# Altium PCB CN02.PcbDoc
Units mm, origin at the board's own origin, x right, y up, seen from the top; angles counter-clockwise.
Board outline 43 x 71 mm, 2 copper layers (Top Layer, Bottom Layer); 78 components, 54 nets, 313 pads, 183 vias.
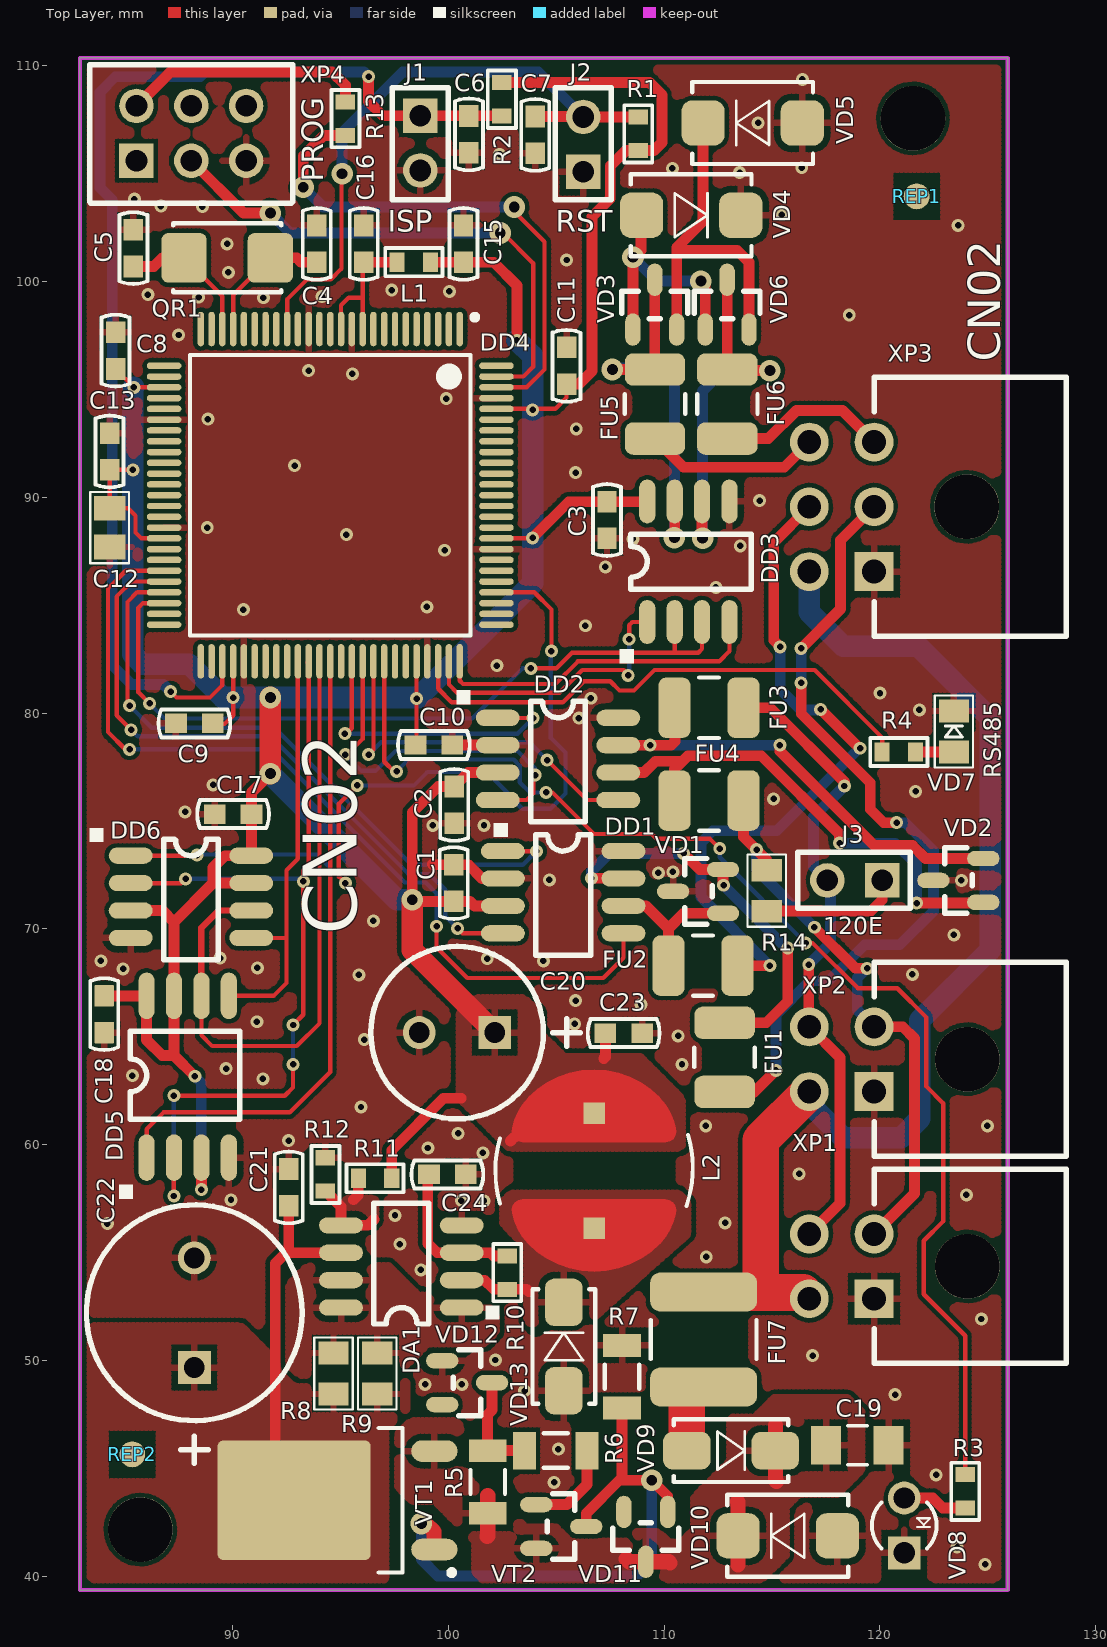
[diagram p0: Top Layer view]
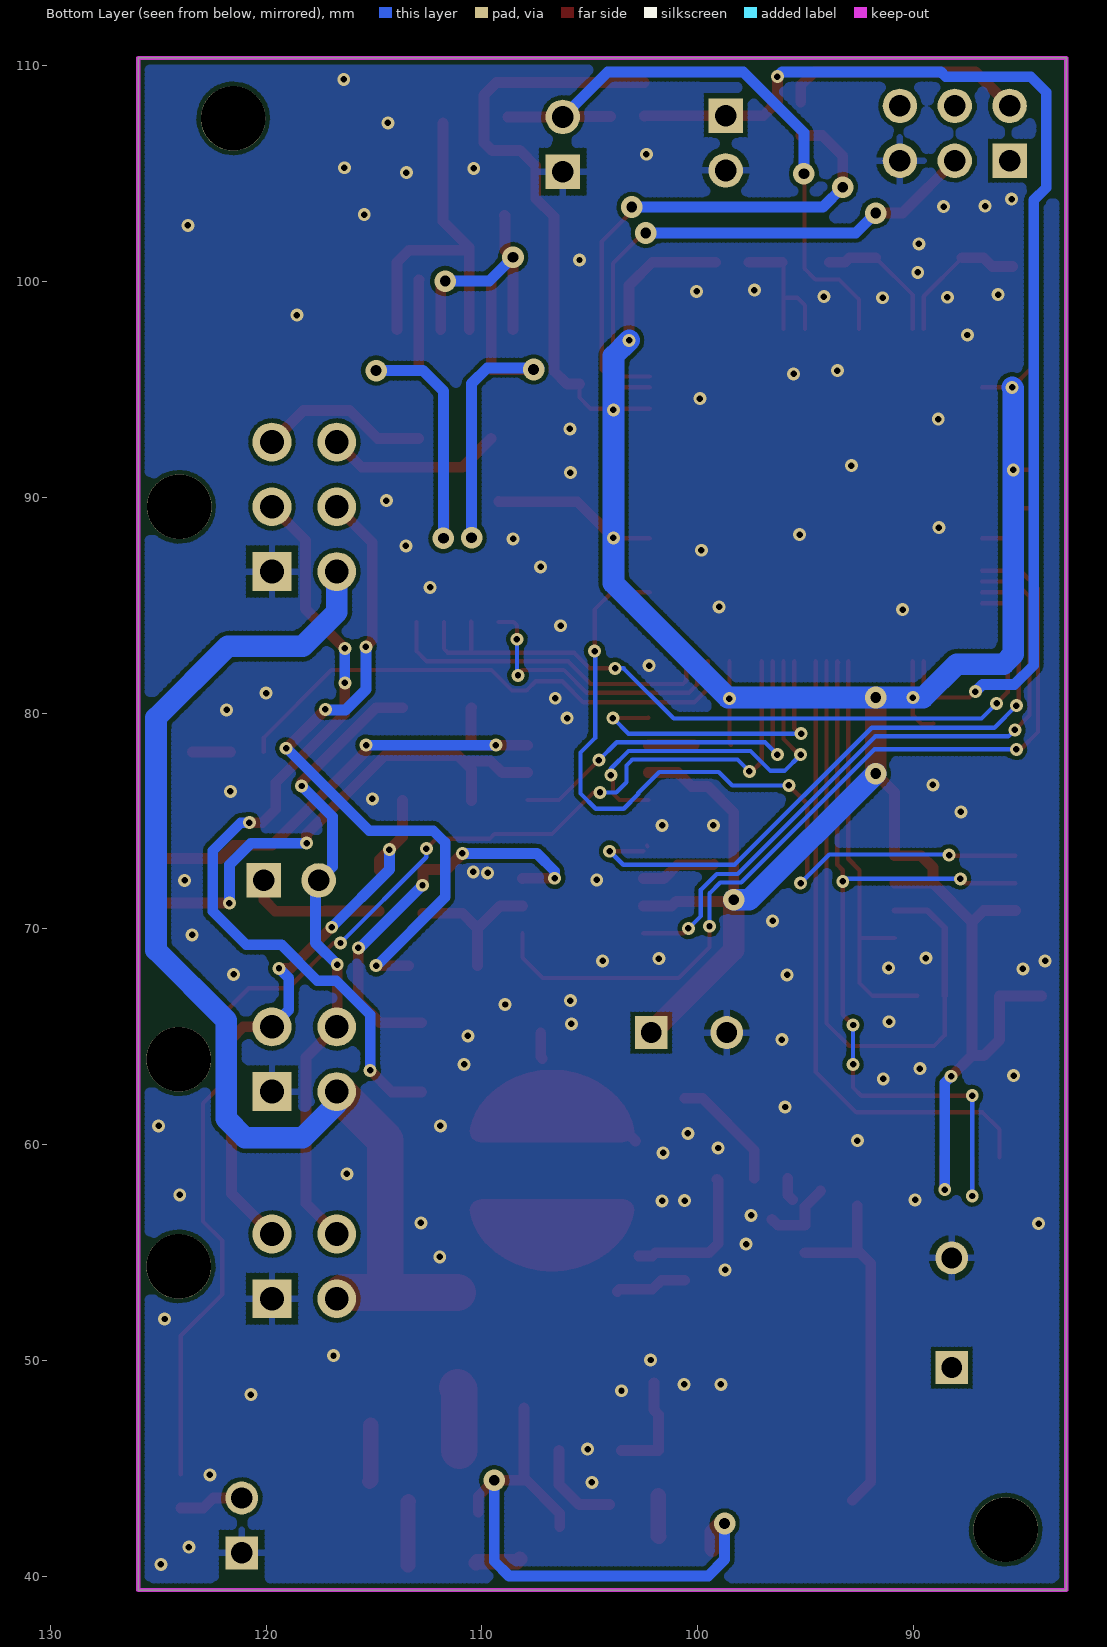
[diagram p1: Bottom Layer view, seen from below]

## Layer stack, top to bottom
Top Solder: solder mask 0.0102, Solder Resist, Dk 3.5
Top Layer: signal copper 0.0356
Dielectric 1: dielectric 0.32, FR-4, Dk 4.8
Bottom Layer: signal copper 0.0356
Bottom Solder: solder mask 0.0102, Solder Resist, Dk 3.5

## Board outline
82.925,39.364 125.925,39.364 125.925,110.364 82.925,110.364

## Design rules (kind name [scope] priority, off if disabled: settings)
Clearance [All] p1: gap=0.2 ignorepadtopadclearanceinfootprint=FALSE
HoleSize [All] p1: absolutevalues=TRUE maxlimit=10 minlimit=0.025 maxpercent=80.000 minpercent=20.000
MinimumSolderMaskSliver [All] p1: minsoldermaskwidth=0.05
PolygonConnect PolygonConnect_1 [IsVia OR InComponent('VT1') AND InNet('VIN_F')] p1: connectstyle=Direct reliefconductorwidth=0.254 reliefentries=4 polygonreliefangle="90 Angle" airgapwidth=0.254
PolygonConnect [All] p2: connectstyle=Relief reliefconductorwidth=0.3 reliefentries=4 polygonreliefangle="90 Angle" airgapwidth=0.3
RoutingVias [All] p1: holewidth=0.4 width=0.8 viastyle="Through Hole" minholewidth=0.3 minwidth=0.6 maxholewidth=0.5 maxwidth=1
SilkToSilkClearance [All] p1: silktosilkclearance=0.1
SilkToSolderMaskClearance [IsPad] p1: minsilkscreentomaskgap=0.15 clearancetoexposedcopper=TRUE
SolderMaskExpansion [All] p1: expansion=0.102
Width [All] p1: maxlimit=3 minlimit=0.2 preferedwidth=0.5
26 further rules are at their usual default settings.

## Classes and differential pairs
component class Power: C19 C20 C21 C22 C23 C24 DA1 FU7 L2 R5 R6 R7 R8 R9 R10 R11 R12 VD9 VD10 VD11 VD12 VD13 VT1 VT2
component class MCU: C4 C5 C6 C7 C8 C9 C10 C11 C12 C13 C15 C16 C17 C18 DD4 DD5 DD6 J1 J2 L1 QR1 R1 R2 R3 R4 REP1 REP2 VD7 VD8
component class Interface: C1 C2 C3 DD1 DD2 DD3 FU1 FU2 FU3 FU4 FU5 FU6 J3 R14 VD1 VD2 VD3 VD4 VD5 VD6
component class Connections: R13 XP1 XP2 XP3 XP4

## Components (designator, comment, footprint, x,y, rotation, side; value= is the part's Value field where it differs from the comment)
C1 "0.1uF" CC0603 100.25,72.125 r270 top
C2 "0.1uF" CC0603 100.275,75.75 r90 top
C3 "0.1uF" CC0603 107.35,88.95 r270 top
C4 "22pF" CC0603 93.9,101.75 r270 top
C5 "22pF" CC0603 85.4,101.55 r270 top
C6 "200pF" CC0603 100.95,106.825 r90 top
C7 "200pF" CC0603 104.025,106.8 r90 top
C8 "0.1uF" CC0603 84.575,96.8 r270 top
C9 "0.1uF" CC0603 88.225,79.525 r0 top
C10 "0.1uF" CC0603 99.325,78.525 r180 top
C11 "0.1uF" CC0603 105.475,96.1 r270 top
C12 "10uF" CC0805 84.3,88.6 r270 top
C13 "0.1uF" CC0603 84.3,92.125 r90 top
C15 "0.1uF" CC0603 100.7,101.75 r270 top
C16 "0.1uF" CC0603 96.075,101.75 r270 top
C17 "0.1uF" CC0603 90.025,75.325 r180 top
C18 "0.1uF" CC0603-3M 84.05,66.05 r270 top
C19 "0.1uF" CC1206 118.95,46.075 r180 top
C20 "1000uFx6.3V" CC8X3.5 102.15,65.2 r180 top
C21 "0.1uF" CC0603 92.6,58.025 r270 top
C22 "470uFx35V" CC16X10_CAP0.5(1)(Primary) 88.225,49.675 r90 top
C23 "0.1uF" CC0603 108.125,65.175 r180 top
C24 "300pF" CC0603 99.95,58.625 r180 top
DA1 "MC34063" SO-8 100.613,52.455 r90 top
DD1 "SN65HVD234D" SO-8 102.525,73.61 r270 top
DD2 "SN65HVD234D" SO-8 102.287,79.785 r270 top
DD3 "SP485EEN" SO-8 109.215,84.225 r0 top
DD4 "LPC1768FBD100" TQFP-100 100.525,97.8 r270 top
DD5 "M25PE16" EIAJ_SO8 86.015,59.407 r90 top
DD6 "FM25CL64-G" SO-8 85.275,73.395 r270 top
FU1 "MICROSMD010F" RC1210 112.8,64.05 r270 top
FU2 "MICROSMD010F" RC1210 111.8,68.3 r0 top
FU3 "MICROSMD010F" RC1210 112.075,80.25 r0 top
FU4 "MICROSMD010F" RC1210 112.075,75.95 r0 top
FU5 "MICROSMD010F" RC1210 109.575,94.325 r270 top
FU6 "MICROSMD010F" RC1210 112.925,94.325 r270 top
FU7 "MF-SMDF050" MF-SMDF 111.825,50.975 r270 top
J1 "PLS-02" PLS-02 98.7,107.689 r270 top
J2 "PLS-02" PLS-02 106.25,105.089 r90 top
J3 "PLS-02" PLS-02 120.1,72.25 r180 top
L1 "10uH" L0603 99.174,100.9 r180 top
L2 "220uH" SDR0805 106.75,58.8 r270 top
QR1 "NX5032GA-12.000MHz LN-CD-1" AC5032_2 89.75,101.1 r180 top
R1 "10k" RC0603 108.8,106.85 r270 top
R2 "10k" RC0603 102.475,108.45 r270 top
R3 "390E" RC0603 123.952,43.942 r270 top
R4 "330E" RC0603 120.875,78.2 r0 top
R5 "220k" RC1206 101.825,44.375 r270 top
R6 "220k" RC1206 104.975,45.825 r0 top
R7 "220k" RC1206 108.05,49.25 r90 top
R8 "1E" RC0805 94.675,49.4 r270 top
R9 "1E" RC0805 96.7,49.4 r270 top
R10 "560k" RC0603 102.725,54.075 r90 top
R11 "18k 1%" RC0603 96.6,58.45 r180 top
R12 "11k 1%" RC0603 94.3,58.625 r270 top
R13 "100E" RC0603 95.225,107.55 r90 top
R14 "120E" RC0805 114.75,71.775 r270 top
REP1 "REPER_POINT_1.2" REPER1.2 121.7,103.95 r90 top
REP2 "REPER_POINT_1.2" REPER1.2 85.35,45.65 r90 top
VD1 "PESD2CAN" SOT-23(123) 112.738,70.725 r0 top
VD2 "PESD2CAN" SOT-23(123) 124.799,71.234 r0 top
VD3 "BAV99" SOT-23(GSD) 108.55,97.762 r0 top
VD4 "SMBJ5.0A" SMB 111.25,103.075 r180 top
VD5 "SMBJ5.0A" SMB 114.1,107.35 r0 top
VD6 "BAV99" SOT-23(GSD) 111.9,97.762 r0 top
VD7 "BL-HGE35A-AV-TRB" LED0805 123.425,78.2 r90 top
VD8 "BL-B45V1-L" LED3 121.125,41.089 r90 top
VD9 "GS1M" SMA 113.1,45.825 r0 top value={Value}
VD10 "SMBJ150A" SMB 115.725,41.875 r0 top
VD11 "BZX84C15" SOT-23(123) 110.166,42.999 r90 top value={Value}
VD12 "BZX84C39" SOT-23(123) 99.701,49.991 r180 top value={Value}
VD13 "SS14" SMA 105.35,50.65 r90 top
VT1 "FQD5P20TM" D-PAK(TO-252AA) 94.85,43.525 r180 top
VT2 "BC807-40" SOT-23(123) 104.062,43.325 r180 top
XP1 "MIF2X02PRP" MIF2X02PRP 119.725,52.864 r0 top
XP2 "MIF2X02PRP" MIF2X02PRP 119.725,62.464 r0 top
XP3 "MIF2X03PRP" MIF2X03PRP 119.725,86.564 r0 top
XP4 "PLD-06" PIN6 85.545,105.599 r0 top

## Footprints (in the part's own frame and the unit in brackets; to place one, negate y for a bottom-side part, rotate by r counter-clockwise, add the part's x,y. Pads: shape width x height; smd on the part's side, far side on the other; paste and mask are expansions set on the pad)
AC5032_2 [mm]
  rrect30% 2.1x2.3 smd mask+0.076: 1(-2,0) 2(2,0)
  silkscreen extent -2.5,-1.6 2.5,1.6
CC8X3.5 [mil]
  rect 60x60 hole 38 mask+2.99: 1(0,0)
  round 60 hole 38 mask+2.99: 2(137.8,0)
  silkscreen extent -156,-157 226,157
CC16X10_CAP0.5(1)(Primary) [mil]
  round 60 hole 38 mask+2.99: 1(200,0)
  rect 60x60 hole 38 mask+2.99: 2(0,0)
  silkscreen extent -175,-197 297,197
CC0603 [mm]
  rect 1x0.9 smd paste-25.4 mask+0.076: 1(-0.85,0) 2(0.85,0)
  silkscreen extent -1.66,-0.65 1.66,0.65
CC0603-3M [mm]
  rrect10% 1x0.9 smd paste-25.4 mask+0.076: 1(-0.851,0) 2(0.851,0)
  silkscreen extent -1.66,-0.65 1.66,0.65
CC0805 [mm]
  rect 1.15x1.45 smd paste-25.4 mask+0.076: 1(-0.9,0) 2(0.9,0)
  silkscreen extent -1.65,-0.9 1.65,0.9
CC1206 [mm]
  rect 1.4x1.8 smd paste-25.4 mask+0.076: 1(-1.45,0) 2(1.45,0)
  silkscreen extent -0.45,-0.9 0.45,0.9
D-PAK(TO-252AA) [mm]
  oval 2.15x1 smd paste+0.076 mask+0.076: 1(-4.5,2.28) 3(-4.5,-2.28)
  rrect10% 7.1x5.55 smd paste-4 mask+0.076: 2(2,0)
  silkscreen extent -5.42,-3.35 -1.92,3.47
EIAJ_SO8 [mil]
  oval 85x29.53 smd mask+2.99: 1(0,0) 2(0,-50) 3(0,-100) 4(0,-150) 5(295,-150) 6(295,-100) 7(295,-50) 8(295,0)
  silkscreen extent -75,-170 230,50
L0603 [mm]
  rect 0.7x0.9 smd paste-25.4 mask+0.076: 1(0,0) 2(1.549,0)
  silkscreen extent -0.55,-0.65 2.1,0.65
LED3 [mil]
  rect 60x60 hole 39 mask+2.99: 1(0,0)
  round 60 hole 39 mask+2.99: 2(100,0)
  silkscreen extent 8,-59 92,59
LED0805 [mm]
  rect 1.05x1.4 smd paste-25.4 mask+0.076: 1(0,0) 2(1.9,0)
  silkscreen extent -0.72,-0.89 2.62,0.89
MF-SMDF [mm]
  rrect50% 1.8x4.95 smd mask+0.076: 1(-2.2,0) 2(2.2,0)
  silkscreen extent -0.9,-2.45 0.9,2.45
MIF2X02PRP [mm]
  rect 1.8x1.8 hole 1.1 mask+0.076: 1(0,0)
  round 1.8 hole 1.1 mask+0.076: 2(0,3) 3(-3,0) 4(-3,3)
  round 3 hole 3 unplated mask+0.076: 5(4.32,1.5)
  silkscreen extent 0,-3 8.9,6
MIF2X03PRP [mm]
  rect 1.8x1.8 hole 1.1 mask+0.076: 1(0,0)
  round 1.8 hole 1.1 mask+0.076: 2(0,3) 3(0,6) 4(-3,0) 5(-3,3) 6(-3,6)
  round 3 hole 3 unplated mask+0.076: 7(4.3,3)
  silkscreen extent 0,-3 8.9,9
PIN6 [mm]
  rect 1.6x1.6 hole 1 mask+0.076: 1(0,0)
  round 1.6 hole 1 mask+0.076: 2(0,2.54) 3(2.54,0) 4(2.54,2.54) 5(5.08,0) 6(5.08,2.54)
  silkscreen extent -2.16,-1.96 7.24,4.44
PLS-02 [mm]
  rect 1.6x1.6 hole 1 mask+0.076: 1(0,0)
  round 1.6 hole 1 mask+0.076: 2(2.54,0)
  silkscreen extent -1.3,-1.3 3.9,1.3
RC0603 [mm]
  rect 0.7x0.9 smd paste-25.4 mask+0.076: 1(-0.775,0) 2(0.774,0)
  silkscreen extent -1.32,-0.65 1.33,0.65
RC0805 [mm]
  rect 1.05x1.4 smd paste-25.4 mask+0.076: 1(-0.95,0) 2(0.95,0)
  silkscreen extent -1.67,-0.89 1.67,0.89
RC1206 [mm]
  rect 1.05x1.75 smd paste-25.4 mask+0.076: 1(-1.45,0) 2(1.45,0)
  silkscreen extent -0.55,-0.8 0.55,0.8
RC1210 [mm]
  rrect50% 1.5x2.8 smd mask+0.076: 1(-1.6,0) 2(1.6,0)
  silkscreen extent -0.45,-1.4 0.45,1.4
REPER1.2 [mm]
  round 1.2 smd paste-25.4 mask-25.4: 1(0,0)
  Top Layer pour cut-out: -1.35,-1.325 1.325,-1.325 1.325,1.325 -1.35,1.325
SDR0805 [mm]
  rect 1x1 smd paste-25.4 mask+0.076: 1(-2.667,0) 2(2.667,0)
  Top Layer region: -1.327,3.319 -1.362,3.503 -1.461,3.66 -1.612,3.771 -1.792,3.818 -1.977,3.797 -2.318,3.69 -2.706,3.535 -3.065,3.321 -3.387,3.053 -3.392,3.047 -3.771,2.627 -4.09,2.16 -4.345,1.654 -4.53,1.119 -4.642,0.565 -4.68,0 -4.642,-0.565 -4.53,-1.119 -4.345,-1.654 -4.09,-2.16 -3.771,-2.627 -3.392,-3.047 -3.381,-3.059 -3.063,-3.323 -2.709,-3.534 -2.325,-3.688 -1.996,-3.791 -1.806,-3.813 -1.62,-3.764 -1.465,-3.65 -1.363,-3.488 -1.327,-3.299
  Top Layer region: 1.327,-3.319 1.362,-3.503 1.461,-3.66 1.612,-3.771 1.792,-3.818 1.977,-3.797 2.318,-3.69 2.706,-3.535 3.065,-3.321 3.387,-3.053 3.392,-3.047 3.771,-2.627 4.09,-2.16 4.345,-1.654 4.53,-1.119 4.642,-0.565 4.68,0 4.642,0.565 4.53,1.119 4.345,1.654 4.09,2.16 3.771,2.627 3.392,3.047 3.381,3.059 3.063,3.323 2.709,3.534 2.325,3.688 1.996,3.791 1.806,3.813 1.62,3.764 1.465,3.65 1.363,3.488 1.327,3.299
  silkscreen extent -1.66,-4.57 1.64,4.57
SMA [mm]
  rrect50% 2.2x1.75 smd mask+0.076: 1(-2.05,0) 2(2.05,0)
  silkscreen extent -2.65,-1.45 2.65,1.45
SMB [mm]
  rrect50% 2x2.1 smd mask+0.076: 1(2.3,0) 2(-2.3,0)
  silkscreen extent -2.8,-1.9 2.8,1.9
SO-8 [mil]
  oval 29.53x80 smd mask+2.99: 1(0,0) 2(50,0) 3(100,0) 4(150,0) 5(150,220) 6(100,220) 7(50,220) 8(0,220)
  silkscreen extent -30,-69 190,160
SOT-23(123) [mil]
  oval 59.06x28.07 smd mask+2.99: 1(-0.5,0) 2(-0.5,80) 3(-91.5,40)
  silkscreen extent -70,-20 -20,100
SOT-23(GSD) [mil]
  oval 28.07x59.06 smd mask+2.99: 1(0,0.5) 2(80,0.5) 3(40,91.5)
  silkscreen extent -20,20 100,70
TQFP-100 [mm]
  oval 1.6x0.3 smd mask+0.05: 1(0,0) 2(0,-0.5) 3(0,-1) 4(0,-1.5) 5(0,-2) 6(0,-2.5) 7(0,-3) 8(0,-3.5) 9(0,-4) 10(0,-4.5) 11(0,-5) 12(0,-5.5) 13(0,-6) 14(0,-6.5) 15(0,-7) 16(0,-7.5) 17(0,-8) 18(0,-8.5) 19(0,-9) 20(0,-9.5) 21(0,-10) 22(0,-10.5) 23(0,-11) 24(0,-11.5) 25(0,-12) 51(15.4,-12) 52(15.4,-11.5) 53(15.4,-11) 54(15.4,-10.5) 55(15.4,-10) 56(15.4,-9.5) 57(15.4,-9) 58(15.4,-8.5) 59(15.4,-8) 60(15.4,-7.5) 61(15.4,-7) 62(15.4,-6.5) 63(15.4,-6) 64(15.4,-5.5) 65(15.4,-5) 66(15.4,-4.5) 67(15.4,-4) 68(15.4,-3.5) 69(15.4,-3) 70(15.4,-2.5) 71(15.4,-2) 72(15.4,-1.5) 73(15.4,-1) 74(15.4,-0.5) 75(15.4,0)
  oval 0.3x1.6 smd mask+0.05: 26(1.7,-13.7) 27(2.2,-13.7) 28(2.7,-13.7) 29(3.2,-13.7) 30(3.7,-13.7) 31(4.2,-13.7) 32(4.7,-13.7) 33(5.2,-13.7) 34(5.7,-13.7) 35(6.2,-13.7) 36(6.7,-13.7) 37(7.2,-13.7) 38(7.7,-13.7) 39(8.2,-13.7) 40(8.7,-13.7) 41(9.2,-13.7) 42(9.7,-13.7) 43(10.2,-13.7) 44(10.7,-13.7) 45(11.2,-13.7) 46(11.7,-13.7) 47(12.2,-13.7) 48(12.7,-13.7) 49(13.2,-13.7) 50(13.7,-13.7) 76(13.7,1.7) 77(13.2,1.7) 78(12.7,1.7) 79(12.2,1.7) 80(11.7,1.7) 81(11.2,1.7) 82(10.7,1.7) 83(10.2,1.7) 84(9.7,1.7) 85(9.2,1.7) 86(8.7,1.7) 87(8.2,1.7) 88(7.7,1.7) 89(7.2,1.7) 90(6.7,1.7) 91(6.2,1.7) 92(5.7,1.7) 93(5.2,1.7) 94(4.7,1.7) 95(4.2,1.7) 96(3.7,1.7) 97(3.2,1.7) 98(2.7,1.7) 99(2.2,1.7) 100(1.7,1.7)
  silkscreen extent -0.67,-12.5 14.2,0.82

## Part data
C1 C2 C3 C4 C5 C6 C7 C8 C9 C10 C11 C13 C15 C16 C17 C18 C21 C23 C24: library part CC0603, "CC0603"
C12: library part CC0805, "CC0805"
C19: library part CC1206, "CC1206"
C20: library part CAP0.35, "CAP0.35"
C22: library part CAP0.5(1), "CAP0.5(1)"
DD1 DD2: "CAN Transceiver"
DD3: library part SP485, "SP485"
DD4: "Cortex -M3 32-Bit Microcontroller, 512KB Flash, 64KB RAM, 100-Lead LQFP", ComponentLink1Description="Manufacturer Link", ComponentLink1URL=http://www.nxp.com/
DD5: library part S25FL016A0LMFI01, "S25FL016A0LMFI01"
FU1 FU2 FU3 FU4 FU5 FU6: library part MICROSMD, "MICROSMD"
FU7: library part MF-SMDF, "MF-SMDF"
L1: library part L0603, "L0603"
L2: library part SDR0805, "SDR0805"
QR1: library part AC5032_2, "AC5032/2"
R1 R2 R3 R4 R10 R11 R12 R13: library part RC0603, "RC0603"
R5 R6 R7: library part RC1206, "RC1206"
R8 R9 R14: library part RC0805, "RC0805"
REP1 REP2: library part REPER1.2, "REPER1.2"
VD1 VD2: "TVS for CAN"
VD3 VD6: "1.0 Ampere General Purpose Rectifier", ComponentField6="Published 8-Jun-2000, Modified 11-July-2000: SIM Model Added."
VD4 VD5 VD10: library part SMBJ, "SMBJ"
VD7: library part LED_0805
VD8: library part LED_3, "LED_3"
VD11 VD12: library part BZX84, "Zener Voltage Regulator Diode"
VD13: "Schottky Rectifier", ComponentField6="Published 8-Jun-2000, Modified 10-July-2000: SIM Model Added.", OriginalName=10BQ100
VT1: library part IRFR9220, "HEXFET Power MOSFET", ComponentField7="Published 8-Jun-2000", OriginalName=IRLML5103
VT2: library part BC857B, "BC857B", ComponentField7="Published 29-Sep-2000", OriginalName=BC846BLT1
XP4: "PLD06"

## Free pads (board coordinates)
  round 3 hole 3 mask+0.076: 0(85.725,42.164) 0(121.525,107.564)

## Via types
v1: diameter 0.6, hole 0.3, Top Layer to Bottom Layer, 167 vias
v2: diameter 1, hole 0.5, Top Layer to Bottom Layer, 16 vias

## Nets (pads, with @x,y where several pads share a name; then routed paths per layer and width w, separated by ;. In a path a pad name is that pad's centre, name@x,y a point inside that pad or via, vN(x,y) a via of type N, cw(c..) or ccw(c..) an arc to the next point about the centre after c; other vN are vias at no path point)
+3V3: C1.2 C2.2 C3.1 C8.2 C9.2 C10.2 C11.2 C12.1 C13.1 C15.2 C17.1 C18.1 C20.1 C23.2 DD1.3 DD2.3 DD3.8 DD4.28 DD4.42 DD4.54 DD4.71 DD4.84 DD4.96 DD5.3 DD5.7 DD5.8 DD6.3 DD6.7 DD6.8 L1.1 L2.1 R1.2 R2.1 R11.1 | length 178.6
  Top Layer w0.2: C8.2 v1(85.425,95.1) DD4.28 ; v1(85.375,91.275) C13.1 C12.1 85.15,89.5 85.5,89.15 85.5,88.375 85.775,88.1 DD4.42 ; C9.2 89.1,79.5 89.625,79.5 90.025,79.9 DD4.54 ; C10.2@98.45,78.525 98.525,78.6 DD4.71 ; DD4.84 v1@103.875,88.1 ; DD4.96 104.95,94.1 105.475,94.625 C11.2
  Top Layer w0.5: C18.1 DD5.8 86.015,64.86 86.735,64.14 87.285,64.14 ; DD6.3 86.745,70.855 87.285,70.315 ; v1(88.25,63.175) 87.285,64.14 ; v1(88.55,57.925) 88.555,57.93 DD5.3 ; DD6.7 89.095,72.125 ; v2(91.75,77.2) 90.875,76.325 C17.1 90.875,73.407 DD6.8 89.645,73.395 89.095,72.845 89.095,72.125 ; R11.1 97.375,59.75 99.775,62.15 100.6,62.15 ; L1.1 C15.2 102.1,100.9 103.175,99.825 v1(103.175,97.275) ; DD2.3 100.92,77.245 C2.2 99.525,76.6 98.325,75.4 v2(98.325,71.35) 98.4,71.275 C1.2 101,71.275 101.205,71.07 DD1.3 ; R2.1 109.325,109.225 109.9,108.65 109.9,106.45 109.526,106.076 R1.2 108.226,106.076 107.5,105.35 107.5,103.85 106.65,103 106.65,95.85 106.05,95.25 C11.2 ; 102.875,60.175 103.043,60.343 ; v1@103.875,88.1 v1(103.9,88.125) 105.575,89.8 C3.1 109.202,89.8 DD3.8 ; 107.2,64 107.275,64.075 C23.2 ; 87.285,64.14 DD5.7 87.285,70.315 ; 87.285,70.315 89.095,72.125
  Top Layer w1: v2(91.75,77.2) v2(91.75,80.725) ; v2(98.325,71.35) 98.325,69.025 C20.1
  Bottom Layer w0.5: v1(88.25,63.175) 88.55,62.875 v1(88.55,57.925)
  Bottom Layer w1: v1(85.425,95.1) 85.375,95.05 v1(85.375,91.275) 85.375,82.725 85.825,82.275 88,82.275 89.55,80.725 v1(90.025,80.725) v2(91.75,80.725) 98.6,80.725 103.9,86.025 v1(103.9,88.125) v1(103.9,94.05) 103.9,96.55 v1(103.175,97.275) ; v2(91.75,77.2) 97.6,71.35 v2(98.325,71.35)
  other v1: 98.525,80.675
CAN_CON: DD4.68 R3.1 | length 58.5
  Top Layer w0.2: DD4.68 97.025,77.75 97.5,77.275 97.525,77.3 v1(97.6,77.3) ; v1(104.525,76.325) 104.825,76.325 106.75,74.4 109.425,74.4 109.65,74.175 112.125,74.175 v1(112.575,73.725) ; v1(116.55,69.35) 116.875,69.35 118.975,67.25 120.8,67.25 122.15,65.9 122.15,62.7 122.925,61.925 122.925,56.45 122.025,55.55 122.025,53.075 123.952,51.148 R3.1
  Bottom Layer w0.2: v1(97.6,77.3) 98.15,77.85 103.025,77.85 103.3,77.575 103.3,76.8 103.775,76.325 v1(104.525,76.325) ; v1(112.575,73.725) 112.575,73.325 v1(116.55,69.35)
CAN_D: DD1.1 DD4.47 | length 30.5
  Top Layer w0.2: v1(85.225,80.35) 85.125,80.45 85.125,85.15 85.575,85.6 DD4.47 ; DD1.1@102.325,73.835 DD1.1@102.35,73.86 ; DD1.1 102.535,73.6 v1(104.075,73.6)
  Bottom Layer w0.2: v1(85.225,80.35) 86.25,79.325 91.935,79.325 98.285,72.975 103.45,72.975 v1(104.075,73.6)
CAN_D_S6: DD2.1 DD4.65 | length 14.2
  Top Layer w0.2: v1(95.2,79.05) 95.275,79.05 95.525,79.3 DD4.65 ; DD2.1 102.297,79.775 v1(103.925,79.775)
  Bottom Layer w0.2: v1(95.2,79.05) 103.2,79.05 v1(103.925,79.775)
CAN_EN: DD1.5 DD4.45 | length 41.2
  Top Layer w0.2: v1(85.225,78.325) 85.025,78.325 84.225,79.125 84.225,85.775 85.05,86.6 DD4.45 ; v1(99.45,70.125) 99.45,69.15 100.875,67.725 107.175,67.725 108.113,68.663 DD1.5
  Bottom Layer w0.2: v1(85.225,78.325) 91.804,78.325 97.979,72.15 98.95,72.15 99.45,71.65 v1(99.45,70.125)
CAN_EN_S6: DD2.5 DD4.67 | length 17.3
  Top Layer w0.2: v1(96.3,78.075) 96.525,78.3 DD4.67 ; v1(104.575,77.825) 106.425,75.975 DD2.5
  Bottom Layer w0.2: v1(96.3,78.075) 96.875,78.65 103.75,78.65 v1(104.575,77.825)
CAN_H: FU1.2 XP3.2 | length 37.9
  Top Layer w0.5: FU1.2 114.175,62.45 v1(115.175,63.45) ; v1(116.35,81.4) 116.35,79.975 119.55,76.775 119.55,75.55 120.175,74.925 v1(120.775,74.925) ; v1(116.35,83) 118.175,84.825 118.175,88.014 XP3.2
  Bottom Layer w0.5: v1(115.175,63.45) 115.175,66.025 116.75,67.6 117.625,67.6 119.289,69.264 120.914,69.264 122.475,70.825 122.475,73.625 121.175,74.925 v1(120.775,74.925) ; v1(116.35,81.4) v1(116.35,83)
CAN_L: FU2.2 XP3.5 | length 31.8
  Top Layer w0.5: FU2.2 v1(114.9,68.3) ; v1(115.375,83.075) 115.075,83.375 115.075,87.914 XP3.5 ; v1(117.25,80.175) 119.05,78.375 v1(119.075,78.375)
  Bottom Layer w0.5: v1(114.9,68.3) 114.875,68.3 111.7,71.475 111.7,74 112.25,74.55 115.214,74.55 119.039,78.375 v1(119.075,78.375) ; v1(115.375,83.075) 115.375,81.1 116.325,80.15 117.225,80.15 v1(117.25,80.175)
CAN_R: DD1.4 DD4.46 | length 30.8
  Top Layer w0.2: v1(85.3,79.225) 84.625,79.9 84.625,85.4 85.325,86.1 DD4.46 ; v1(100.425,70.025) 100.65,69.8 DD1.4
  Bottom Layer w0.2: v1(85.3,79.225) 85.6,78.925 91.769,78.925 98.144,72.55 99.116,72.55 99.85,71.816 99.85,70.6 v1(100.425,70.025)
CAN_R_S6: DD2.4 DD4.66 | length 17.5
  Top Layer w0.2: v1(95.225,78.075) 95.3,78.075 96.025,78.8 DD4.66 ; DD2.4 103.625,75.975 103.925,76.275 103.925,77.025 v1(104.025,77.125)
  Bottom Layer w0.2: v1(95.225,78.075) 95.975,77.325 96.625,77.325 97.55,78.25 103.2,78.25 104.025,77.425 v1(104.025,77.125)
GND: C1.1 C2.1 C3.2 C4.1 C5.1 C6.1 C7.1 C8.1 C9.1 C10.1 C11.1 C12.2 C13.2 C15.1 C16.1 C17.2 C18.2 C19.1 C20.2 C21.1 C22.1 C23.1 C24.1 DA1.4 DD1.2 DD1.8 DD2.2 DD2.8 DD3.5 DD4.11 DD4.15 DD4.31 DD4.41 DD4.55 DD4.72 DD4.83 DD4.97 DD5.4 DD6.4 J1.2 J2.1 R7.2 R12.1 VD1.3 VD2.3 VD4.2 VD5.1 VD7.2 VD8.1 VD10.1 VD12.1 VD13.1 XP1.1 XP2.1 XP3.1 XP4.5 | length 5.7
  Top Layer w0.5: 99.25,73 99.275,72.975 C1.1 100.925,72.975 101.56,72.34 DD1.2 ; C10.1 102.277,78.525 DD2.2
  other v1: 124.875,40.55 123.575,41.35 104.9,44.35 122.6,44.7 105.1,45.9 120.7,48.425 103.529,48.6 98.925,48.9 100.625,48.9 102.175,50.025 116.875,50.225 124.7,51.925 98.725,54.2 111.95,54.8 97.75,55.4 84.2,56.35 112.825,56.375 97.525,56.725 100.6,57.408 101.65,57.4 89.925,57.45 124,57.675 116.25,58.65 101.6,59.625 99.05,59.85 92.6,60.193 100.45,60.525 111.925,60.875 124.975,60.875 95.95,61.75 91.4,63.05 85.355,63.2 89.7,63.525 110.825,63.725 96.1,64.875 110.65,65.05 105.85,65.6 91.125,65.7 108.925,66.5 105.9,66.675 95.85,67.875 121.5,67.9 84.925,68.15 91.15,68.2 83.9,68.525 104.4,68.525 101.8,68.627 89.425,68.65 123.425,69.725 96.525,70.375 123.775,72.25 104.675,72.275 109.73,72.6 110.4,72.648 99.275,74.8 101.65,74.8 87.8,75.425 115.075,76.025 121.65,76.375 89.1,76.675 106.05,79.775 121.825,80.15 106.6,80.692 120,80.925 102.25,82.2 106.35,84.05 90.5,84.8 99,84.925 112.4,85.825 107.275,86.775 99.825,87.55 113.525,87.75 108.55,88.075 95.275,88.275 88.825,88.6 114.425,89.85 105.9,91.15 92.875,91.475 105.925,93.175 88.85,93.625 99.9,94.575 95.55,95.725 93.525,95.875 87.5,97.525 118.575,98.45 91.425,99.25 88.425,99.275 94.15,99.3 86.074,99.4 100.05,99.55 97.375,99.6 89.8,100.425 105.475,101 89.75,101.75 123.625,102.6 115.45,103.1 88.6,103.475 86.675,103.5 85.45,103.825 113.5,105.05 110.375,105.25 116.375,105.275 102.375,105.9 114.35,107.35 116.4,109.375
MISO0: DD4.61 DD5.2 DD6.2 | length 40.4
  Top Layer w0.2: DD6.2 87.625,72.125 v1(87.825,72.325) ; v1(87.275,57.625) 87.275,59.397 DD5.2 ; v1(87.275,62.275) 92.418,62.275 92.8,62.657 v1(92.8,63.725) ; v1(92.8,65.55) 93.275,66.025 v1(93.275,72.2) 93.275,72.725 93.525,72.975 DD4.61 DD4.61@93.475,82.35
  Bottom Layer w0.2: v1(87.275,57.625) v1(87.275,62.275) ; v1(87.825,72.325) 93.15,72.325 v1(93.275,72.2) ; v1(92.8,63.725) v1(92.8,65.55)
MOSI0: DD4.60 DD5.5 DD6.5 | length 19.7
  Top Layer w0.2: DD5.5 91.9,66.9 92.5,67.5 92.5,69.6 ; DD6.5 92.485,69.585 92.5,69.6 ; DD4.60 93.025,73.25 92.5,72.725 92.5,69.6
NetC4_2: C4.2 DD4.22 QR1.1 | length 6.2
  Top Layer w0.2: DD4.22 90.025,99.375 QR1.1
  Top Layer w0.5: QR1.1 92.975,101.1 93.175,100.9 C4.2
NetC5_2: C5.2 DD4.23 QR1.2 | length 6.6
  Top Layer w0.2: QR1.2 89.525,99.325 DD4.23
  Top Layer w0.5: C5.2 86.35,100.7 86.75,101.1 QR1.2
NetC6_2: C6.2 DD4.53 J1.1 R2.2 | length 54.4
  Top Layer w0.2: v1(87.125,81) 87.4,80.725 88.95,80.725 89.525,81.3 DD4.53
  Top Layer w0.5: v1(96.3,109.5) 96.3,108.35 96.961,107.689 J1.1 102.462,107.689 R2.2
  Bottom Layer w0.5: v1(87.125,81) 86.8,81.325 85.323,81.325 84.425,82.223 84.425,103.775 83.85,104.35 83.85,108.775 84.564,109.489 88.5,109.489 88.725,109.714 96.086,109.714 v1(96.3,109.5)
NetC7_2: C7.2 DD4.17 J2.2 R1.1 | length 28.8
  Top Layer w0.2: DD4.17 92.525,99.175 93.45,100.1 94.55,100.1 95.05,100.6 95.05,104.975 v2(95.075,105)
  Top Layer w0.5: C7.2 105.875,107.65 105.9,107.625 R1.1
  Bottom Layer w0.5: v2(95.075,105) 95.075,106.9 97.889,109.714 104.165,109.714 J2.2
NetC16_2: C16.2 DD4.10 DD4.12 L1.2 | length 6.9
  Top Layer w0.2: DD4.12 95.025,98.9 95.375,99.25 96.025,99.25 ; DD4.10 96.025,99.25 ; C16.2 96.025,100.85 96.025,99.25
  Top Layer w0.5: C16.2 L1.2
NetC19_2: C19.2 R5.2 VD9.2 VD10.2 VD11.3 VT1.3 VT2.2 | length 9.6
  Top Layer w0.7: 101.8,41.85 101.825,41.875 R5.2 101.825,43.75 ; 108.243,40.8 108.368,40.675 VD11.3 110.225,40.675 110.275,40.625 ; 113.4,43.475 113.425,43.45 VD10.2 113.425,40.525 ; 115.15,47 VD9.2 115.15,44.45 115.2,44.4
NetC24_2: C24.2 DA1.3 R10.2 | length 6.9
  Top Layer w0.5: C24.2@99.1,58.4 99.047,58.347 99.047,55.428 99.48,54.995 DA1.3 101.955,54.995 102.101,54.849 R10.2
NetDA1_1: DA1.1 DA1.7 DA1.8 R8.1 R9.1
NetDA1_2: DA1.2 L2.2 R10.1 VD13.2 | length 3.3
  Top Layer w0.5: DA1.2 101.675,53.725 102.1,53.3 R10.1 103.625,53.3 103.725,53.2
NetDA1_5: DA1.5 R11.2 R12.2 | length 4.6
  Top Layer w0.5: R12.2 95.025,57.126 DA1.5 96.278,56.265 96.55,56.537 ; 95.6,57.45 95.826,57.676 R11.2
NetDD1_6: DD1.6 FU2.1 VD1.1 | length 7.1
  Top Layer w0.5: DD1.6 109.155,71.07 110.2,70.025 ; FU2.1 110.2,70.025 ; VD1.1 110.9,70.725 110.2,70.025
NetDD1_7: DD1.7 FU1.1 VD1.2 | length 19.3
  Top Layer w0.5: v1(106.625,72.35) 108.103,72.35 DD1.7 ; v1(110.9,73.5) 111.643,72.757 VD1.2 112.725,72.05 v1(112.75,72.025) ; FU1.1 114.725,65.65 115.725,66.65 v1(115.725,69.125)
  Bottom Layer w0.5: v1(106.625,72.35) 106.625,72.675 107.45,73.5 v1(110.9,73.5) ; v1(112.75,72.025) 115.65,69.125 v1(115.725,69.125)
NetDD2_6: DD2.6 FU4.1 VD2.1 | length 23.3
  Top Layer w0.5: DD2.6 109.07,77.245 109.6,77.775 110.85,77.775 ; FU4.1 110.475,77.4 110.85,77.775 ; v1(118.125,73.975) 118.125,74.4 114.5,78.025 111.1,78.025 110.85,77.775 ; v1(121.7,71.2) 124.752,71.2 VD2.1
  Bottom Layer w0.5: v1(118.125,73.975) 120.7,73.975 121.7,72.975 v1(121.7,71.2)
NetDD2_7: DD2.7 FU3.1 VD2.2 | length 22
  Top Layer w0.5: DD2.7 v1(109.35,78.515) 110.315,78.515 110.5,78.7 110.5,80.225 FU3.1 ; v1(115.365,78.515) 115.365,78.235 119.725,73.875 121.5,73.875 122.109,73.266 VD2.2
  Bottom Layer w0.5: v1(109.35,78.515) v1(115.365,78.515)
NetDD3_6: DD3.6 FU6.1 VD6.3 | length 18.2
  Top Layer w0.5: DD3.6 111.755,88.13 v2(111.78,88.104) ; VD6.3 112.925,100.077 FU6.1 112.975,95.875 v2(114.9,95.875)
  Bottom Layer w0.5: v2(111.78,88.104) 111.78,94.93 112.725,95.875 v2(114.9,95.875)
NetDD3_7: DD3.7 FU5.1 VD3.3 | length 18.7
  Top Layer w0.5: v2(107.6,95.925) 109.557,95.925 109.566,95.934 VD3.3 ; v2(110.475,88.125) 110.485,88.135 DD3.7
  Bottom Layer w0.5: v2(107.6,95.925) 107.425,95.925 107.35,96 109.75,96 110.475,95.275 v2(110.475,88.125)
NetFU3_2: FU3.2 J3.2 XP1.4 XP2.4 | length 29.6
  Top Layer w0.5: FU3.2 114.911,80.25 118.35,76.811 v1(118.35,76.625) ; v1(116.7,68.35) 116.7,65.489 XP2.4 118.15,64.039 118.15,57.289 XP1.4
  Bottom Layer w0.5: v1(116.7,68.35) 117.706,69.356 117.706,72.104 J3.2 116.925,72.885 116.925,75.2 v1(118.35,76.625)
NetFU4_2: FU4.2 R14.1 XP1.2 XP2.2 | length 26.8
  Top Layer w0.5: FU4.2 113.675,74.275 114.75,73.2 R14.1 ; v1(116.956,70.078) 118.859,68.175 v1(119.4,68.175) ; XP1.2 121.6,57.739 121.6,64.92 121.056,65.464 XP2.2
  Bottom Layer w0.5: v1(114.281,73.679) 114.281,72.754 v1(116.956,70.078) ; v1(119.4,68.175) 118.95,67.725 118.95,66.239 XP2.2
NetFU7_2: FU7.2 VD9.1 | length 3
  Top Layer w1.7: VD9.1 111.05,48.675 FU7.2@111.125,48.75
NetJ3_1: J3.1 R14.2 | length 6.5
  Top Layer w0.5: R14.2 114.753,70.828 117.266,70.828 117.27,70.825 119.575,70.825 120.1,71.35 J3.1
NetR3_2: R3.2 VD8.2 | length 3
  Top Layer w0.5: VD8.2 122.446,43.629 122.907,43.168 R3.2
NetR4_2: R4.2 VD7.1 | length 1.8
  Top Layer w0.5: R4.2 VD7.1
NetR5_1: R5.1 R6.1 VD12.3 | length 4.9
  Top Layer w0.5: VD12.3 102.025,47.705 101.809,47.489 101.809,45.841 R5.1 R6.1
NetR6_2: R6.2 VT2.1 | length 4.3
  Top Layer w0.5: VT2.1 105.5,43.325 106.425,44.25 R6.2
NetR7_1: R7.1 VD11.1 VT1.1 VT2.3 | length 27.7
  Top Layer w0.5: VT2.3 106.386,42.914 107.922,44.45 ; R7.1 108.05,44.578 107.922,44.45 ; VD11.1 110.166,43.709 v2(109.425,44.45) 107.922,44.45
  Top Layer w0.7: v2(98.75,42.45) 98.95,42.45 99.325,42.075 VT1.1@99.325,41.245
  Bottom Layer w0.5: v2(98.75,42.45) 98.75,40.775 99.511,40.014 108.739,40.014 109.425,40.7 v2(109.425,44.45)
NetR13_2: R13.2 XP4.2 | length 11.4
  Top Layer w0.5: XP4.2 87.12,109.714 94.611,109.714 95.225,109.1 R13.2
NetVD3_1: VD3.1 VD4.1 VD6.1 | length 11.1
  Top Layer w0.5: VD3.1 v2@108.55,101.075 ; v2@108.925,101.45 108.925,103.05 VD4.1 ; v2(111.7,100.025) 111.7,100.125 111.9,99.925 VD6.1
  Bottom Layer w0.5: v2(108.555,101.13) 109.66,100.025 v2(111.7,100.025)
NetVD3_2: VD3.2 VD5.2 VD6.2 | length 16.8
  Top Layer w0.5: VD3.2 110.582,101.582 ; VD5.2 111.8,102.8 110.582,101.582 ; VD6.2 113.932,100.893 113.375,101.45 110.714,101.45 110.582,101.582
RE_DE: DD3.2 DD3.3 DD4.48 | length 35.9
  Top Layer w0.2: v1(86.15,80.45) 85.625,80.975 85.625,84.875 85.85,85.1 DD4.48 ; v1(103.825,82.075) 105,82.075 105.725,82.8 110.475,82.8 ; DD3.2@110.5,84.24 DD3.2 110.485,82.81 110.475,82.8 ; DD3.3 111.755,82.98 111.575,82.8 110.475,82.8
  Bottom Layer w0.2: v1(86.15,80.45) 86.85,79.75 101.106,79.75 103.431,82.075 v1(103.825,82.075)
RS485_A: FU6.2 XP3.3 | length 7.9
  Top Layer w0.5: FU6.2 114.825,92.725 116.125,94.025 118.264,94.025 XP3.3
RS485_B: FU5.2 XP3.6 | length 8.2
  Top Layer w0.5: FU5.2 110.9,91.4 115.561,91.4 XP3.6
RS485_CON: DD4.73 R4.1 | length 25
  Top Layer w0.2: DD4.73 99.525,81.134 100.159,80.5 105.3,80.5 106.275,81.475 107.5,81.475 107.925,81.05 108.6,81.05 109.55,82 116.975,82 120.1,78.875 R4.1
RXD0: DD4.99 XP4.3 | length 24.5
  Top Layer w0.2: DD4.99 103.475,95.6 103.925,96.05 103.925,100.85 102.525,102.25 v2(102.4,102.25)
  Top Layer w0.5: XP4.3 90.509,103.175 v2(91.75,103.175)
  Bottom Layer w0.5: v2(91.75,103.175) 92.675,102.25 v2(102.4,102.25)
RXD_485: DD3.1 DD4.74 | length 13.3
  Top Layer w0.2: DD4.74 100.025,81.325 100.4,80.95 105.15,80.95 106.2,82 108.125,82 108.325,81.8 v1(108.325,81.75) ; v1(108.375,83.425) 108.375,84.075 108.525,84.225 DD3.1
  Bottom Layer w0.2: v1(108.325,81.75) 108.375,81.8 v1(108.375,83.425)
SCK0: DD4.62 DD5.6 DD6.6 | length 30.5
  Top Layer w0.2: DD5.6 88.555,65.07 89.05,64.575 92.975,64.575 94.025,65.625 DD4.62
  Top Layer w0.3: DD5.6 88.555,70.055 89.355,70.855 DD6.6
SS0: DD4.63 DD5.1 | length 29.9
  Top Layer w0.2: DD5.1 86.015,60.715 86.8,61.5 92.65,61.5 94.525,63.375 DD4.63
SS1: DD4.79 DD6.1 | length 38.2
  Top Layer w0.2: DD6.1 88.32,73.395 v1(88.35,73.425) ; v1(95.225,72.125) 94.925,72.425 94.925,75.8 v1(95.775,76.65) ; DD4.79 103.975,85.6 104.775,84.8 v1(104.775,82.875)
  Bottom Layer w0.2: v1(88.35,73.425) 88.375,73.45 93.9,73.45 v1(95.225,72.125) ; v1(95.775,76.65) 98.4,76.65 99.025,77.275 101.775,77.275 102.75,76.3 102.75,76.25 103.425,75.575 104.725,75.575 105.425,76.275 105.425,78.175 104.75,78.85 104.75,82.85 v1(104.775,82.875)
TXD0: DD4.98 R13.1 | length 24.6
  Top Layer w0.2: DD4.98 103.625,95.1 104.45,95.925 104.45,101.85 103.055,103.245 v2(103.055,103.455)
  Top Layer w0.5: v2(93.275,104.375) 93.275,105.825 94.225,106.775 R13.1
  Bottom Layer w0.5: v2(93.275,104.375) 94.195,103.455 v2(103.055,103.455)
TXD_485: DD3.4 DD4.75 | length 15.4
  Top Layer w0.2: DD4.75 100.525,81.5 100.675,81.35 104.95,81.35 106,82.4 112.55,82.4 113.025,82.875 DD3.4
VIN: FU7.1 XP1.3 XP2.3 XP3.4 | length 54.9
  Top Layer w1.7: FU7.1@111.125,53.15 114.475,53.15 ; XP1.3 116.439,53.15 114.475,53.15 ; XP2.3 114.475,60.214 114.475,53.15
  Bottom Layer w1: XP2.3 116.725,61.9 118.3,60.325 120.975,60.325 121.85,61.2 121.85,63.048 121.845,63.053 121.845,65.77 125.1,69.025 125.1,79.775 121.775,83.1 118.3,83.1 116.725,84.675 XP3.4
VIN_F: C21.2 C22.2 DA1.6 R8.2 R9.2 VT1.2 | length 16.8
  Top Layer w0.5: C21.2 92.6,55.125 92.47,54.995 ; VT1.2@92.825,43.525 91.975,44.375 91.975,54.5 92.47,54.995 ; DA1.6 92.47,54.995
pads on no net: DD4.1 DD4.2 DD4.3 DD4.4 DD4.5 DD4.6 DD4.7 DD4.8 DD4.9 DD4.13 DD4.14 DD4.16 DD4.18 DD4.19 DD4.20 DD4.21 DD4.24 DD4.25 DD4.26 DD4.27 DD4.29 DD4.30 DD4.32 DD4.33 DD4.34 DD4.35 DD4.36 DD4.37 DD4.38 DD4.39 DD4.40 DD4.43 DD4.44 DD4.49 DD4.50 DD4.51 DD4.52 DD4.56 DD4.57 DD4.58 DD4.59 DD4.64 DD4.69 DD4.70 DD4.76 DD4.77 DD4.78 DD4.80 DD4.81 DD4.82 DD4.85 DD4.86 DD4.87 DD4.88 DD4.89 DD4.90 DD4.91 DD4.92 DD4.93 DD4.94 DD4.95 DD4.100 REP1.1 REP2.1 VD11.2 VD12.2 XP1.5 XP2.5 XP3.7 XP4.1 XP4.4 XP4.6

## Polygon pours and split planes (outlines as drawn)
NetDA1_2 on Top Layer "NETDA1_2_L01_P012" (hatched 90Degree grid 0.2 track 0.5, remove dead copper, pour order 12): 103.7,55.25 102.6,56.35 102.6,57.35 103.15,57.9 110.425,57.9 111.025,57.3 111.025,55.884 105.763,51.2 104.4,51.2 103.7,51.9
NetDA1_1 on Top Layer "NETDA1_1_L01_P002" (hatched 90Degree grid 0.2 track 0.5, remove dead copper, pour order 2): 93.1,49.4 92.65,49.85 92.65,53.475 93.5,54.325 97.2,54.325 98.575,52.95 101.575,52.95 102.15,52.375 102.15,51.35 101.65,50.85 99.025,50.85 97.575,49.4
NetDA1_5 on Top Layer "NETDA1_5_L01_P006" (hatched 90Degree grid 0.2 track 0.5, remove dead copper, pour order 6): 95.425,59.325 94.55,58.45 93.875,58.45 93.4,57.975 93.4,56.05 93.95,55.5 95.85,55.5 96.55,56.2 96.55,59.125 96.35,59.325
+3V3 on Top Layer "+3V3_L01_P010" (hatched 90Degree grid 0.2 track 0.5, remove dead copper, pour order 10): 110.75,62.125 108.875,64 105.35,64 104.125,65.225 104.125,66.1 103.5,66.725 101.25,66.725 100.575,66.05 100.575,62.175 102.825,59.925 110.75,59.925
NetC19_2 on Top Layer "NETC19_2_L01_P000" (hatched 90Degree grid 0.2 track 0.5, remove dead copper, pour order 0): 113.125,47.3 114.225,47.3 115.125,48.2 118.475,48.2 119.075,47.6 119.075,44.95 118,43.875 116.225,43.875 115.575,43.225 115.575,41 113.939,39.364 102.161,39.364 101.3,40.225 101.3,41.65 99.4,43.55 98.35,43.55 97.725,44.175 97.725,46.575 98.275,47.125 100.325,47.125 100.75,46.7 100.75,44.625 101.325,44.05 102.625,44.05 103.075,43.6 103.075,42.675 103.525,42.225 104.95,42.225 105.625,41.55 108.3,41.55 108.75,42 109.7,42 110.2,41.5 110.8,41.5 111.45,42.15 111.45,43.65 113.125,45.325
VIN_F on Top Layer "VIN_F_L01_P008" (hatched 90Degree grid 0.2 track 0.5, remove dead copper, pour order 8): 97.025,46.8 98.025,47.8 98.025,48.925 97.55,49.4 92.5,49.4 90.375,51.525 82.925,51.525 82.925,39.364 97.025,39.364
GND on Top Layer "GND_L01_P018" (hatched 90Degree grid 0.2 track 0.5, remove dead copper, pour order 18): 82.925,110.364 125.975,110.364 125.975,39.364 82.925,39.364
GND on Bottom Layer "GND_L02_P020" (hatched 90Degree grid 0.2 track 0.5, remove dead copper, pour order 20): 82.925,110.364 125.975,110.364 125.975,39.364 82.925,39.364

## Keep-outs
Keep-Out Layer:
  the board outline again, w0.2

## Other copper
Top Layer:
  pour cut-out: 93.175,57.4 93.95,57.4 94.25,57.1 94.225,57.075 94.225,56.175 94,55.95 93.5,55.95 93.175,56.275
  pour cut-out: 102.775,57.675 102.775,59.9 110.775,59.9 110.775,57.675
  pour cut-out: 109.5,52.125 114.125,52.125 114.125,49.875 109.5,49.875
  pour cut-out: 110.9,93.675 108.275,93.675 108.275,95.05 110.9,95.05
  pour cut-out: 114.225,93.65 111.6,93.65 111.6,95.025 114.225,95.025
  pour cut-out: 111.35,78.925 111.35,81.55 112.725,81.55 112.725,78.925
  pour cut-out: 111.4,74.625 111.4,77.25 112.775,77.25 112.775,74.625
  pour cut-out: 111.1,67 111.1,69.625 112.475,69.625 112.475,67
  pour cut-out: 111.5,64.75 114.125,64.75 114.125,63.375 111.5,63.375

## Silkscreen, mask and mechanical layers (free items; w line width, h text height)
Top Overlay:
  text "PROG" at 94.2,104.625 h1 r90
  text "ISP" at 97.2,102.3 h1
  text "RST" at 104.975,102.3 h1
  text "CN02" at 125.575,96.275 h1.5 r90
  text "RS485" at 125.6,76.975 h0.8 r90
  text "120E" at 117.375,69.75 h0.8
  text "CN02" at 95.75,69.725 h2.5 r90
Mechanical 1:
  circle w0.1: c85.725,42.164 r3
  circle w0.1: c121.525,107.564 r3
  lines w0.002: 113.325,42.364 132.525,42.364 ; 115.625,49.564 115.625,53.614 115.625,55.114 115.625,59.164 115.625,63.214 115.625,64.714 115.625,68.764 ; 115.625,88.814 115.625,90.314 115.625,103.364 ; 128.125,53.614 128.125,55.114 ; 128.125,63.214 128.125,64.714 ; 128.125,88.814 128.125,90.314 ; 122.925,40.864 128.125,40.864 ccw(c128.125,42.364) 128.125,43.864 122.925,43.864 122.925,40.864
  lines w0.1: 115.625,49.564 128.125,49.564 128.125,53.614 115.625,53.614 ; 115.625,55.114 128.125,55.114 128.125,59.164 ; 115.625,59.164 128.125,59.164 ; 115.625,63.214 128.125,63.214 128.125,59.164 ; 115.625,64.714 128.125,64.714 128.125,68.764 115.625,68.764 ; 115.625,90.314 128.125,90.314 128.125,103.364 115.625,103.364 ; 125.925,48.365 115.925,48.365 cw(c115.925,49.365) 114.925,49.365 114.925,68.963 cw(c115.925,68.963) 115.925,69.963 125.925,69.963 ; 125.925,49.065 115.925,49.065 cw(c115.925,49.365) 115.625,49.365 115.625,68.963 cw(c115.925,68.963) 115.925,69.263 125.925,69.263 ; 125.925,74.565 115.925,74.565 cw(c115.925,75.565) 114.925,75.565 114.925,103.563 cw(c115.925,103.563) 115.925,104.563 125.925,104.563 ; 125.925,75.265 115.925,75.265 cw(c115.925,75.565) 115.625,75.565 115.625,103.563 cw(c115.925,103.563) 115.925,103.863 125.925,103.863 ; 115.625,75.764 128.125,75.764 128.125,88.814 115.625,88.814 115.625,75.764
Mechanical 2:
  lines w0.1: 120.607,37.873 121.182,38.448 121.182,38.473 ; 121.182,35.523 121.182,38.473 ; 121.782,37.873 121.182,38.473 ; 148.482,54.598 148.132,54.948 ; 148.582,55.423 148.107,54.948 ; 150.707,54.948 148.107,54.948 ; 121.182,38.473 121.182,38.473 ; 148.107,54.948 148.107,54.948 ; 148.107,54.948 148.132,54.948 ; 148.132,54.948 148.132,54.948 ; 146.307,54.323 147.057,54.323 ccw(c147.084,54.748) 147.057,55.173 146.307,55.173 146.307,54.323
  lines w0.2: 144.932,50.248 144.932,51.423 144.932,54.723 146.282,54.723 ; 135.982,51.248 135.982,52.523 146.282,52.523 146.282,51.248 135.982,51.248
  text "Монтаж VD8" at 133.832,63.948 h3
  text "Монтаж производить" at 132.057,62.048 h2
  text "в сторону края платы B" at 131.457,59.848 h2
  text "A" at 141.057,55.623 h1.52
  text "B" at 149.307,55.598 h1.52
  text "B" at 126.682,42.548 h1.52
  text "A" at 122.407,35.798 h1.52

## Dimensions
144.932,54.723 to 146.282,52.523 on Mechanical 2
146.282,52.523 to 147.51,54.748 on Mechanical 2